# Altium PCB NeoPixel.PcbDoc
Units mil, origin at the board's own origin, x right, y up, seen from the top; angles counter-clockwise.
Board outline 3000 x 2125 mil, 2 copper layers (Top Layer, Bottom Layer); 27 components, 16 nets, 70 pads, 0 vias.
Unrouted connection lines stored in the file: 51.
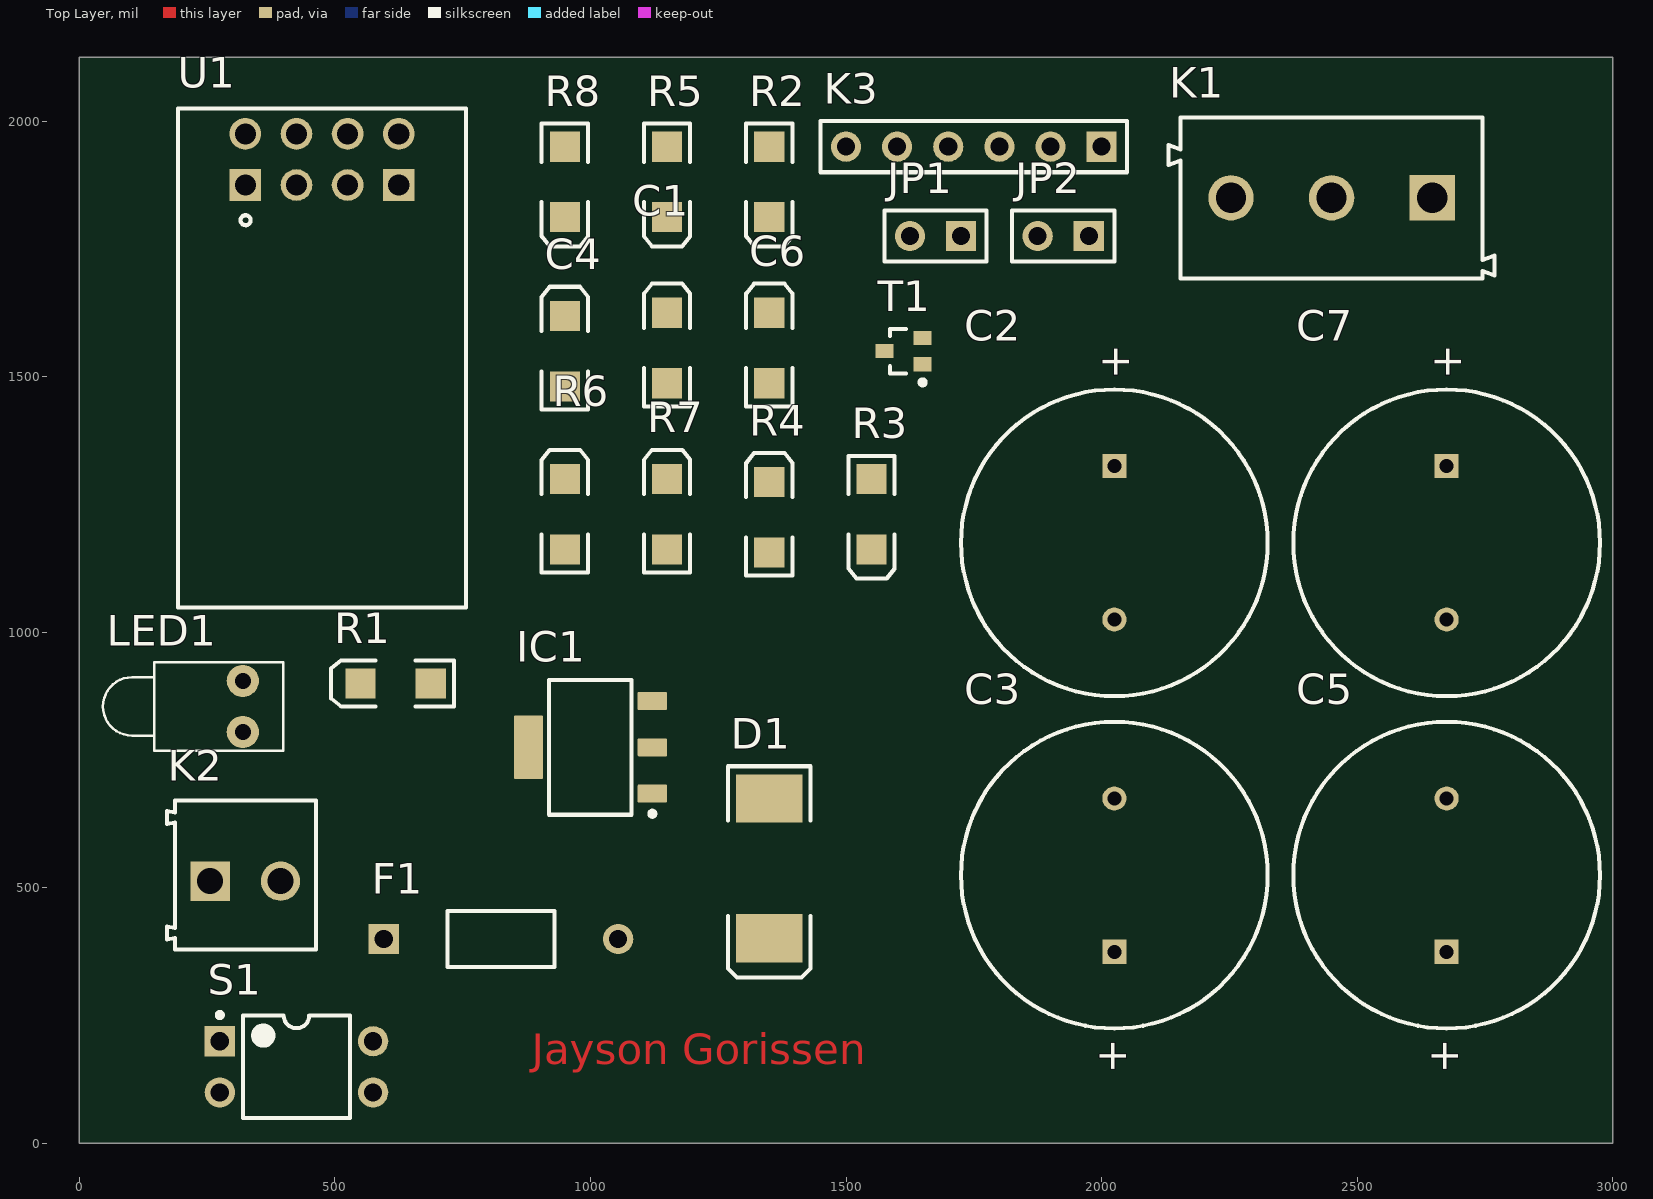
[diagram p0: Top Layer view]
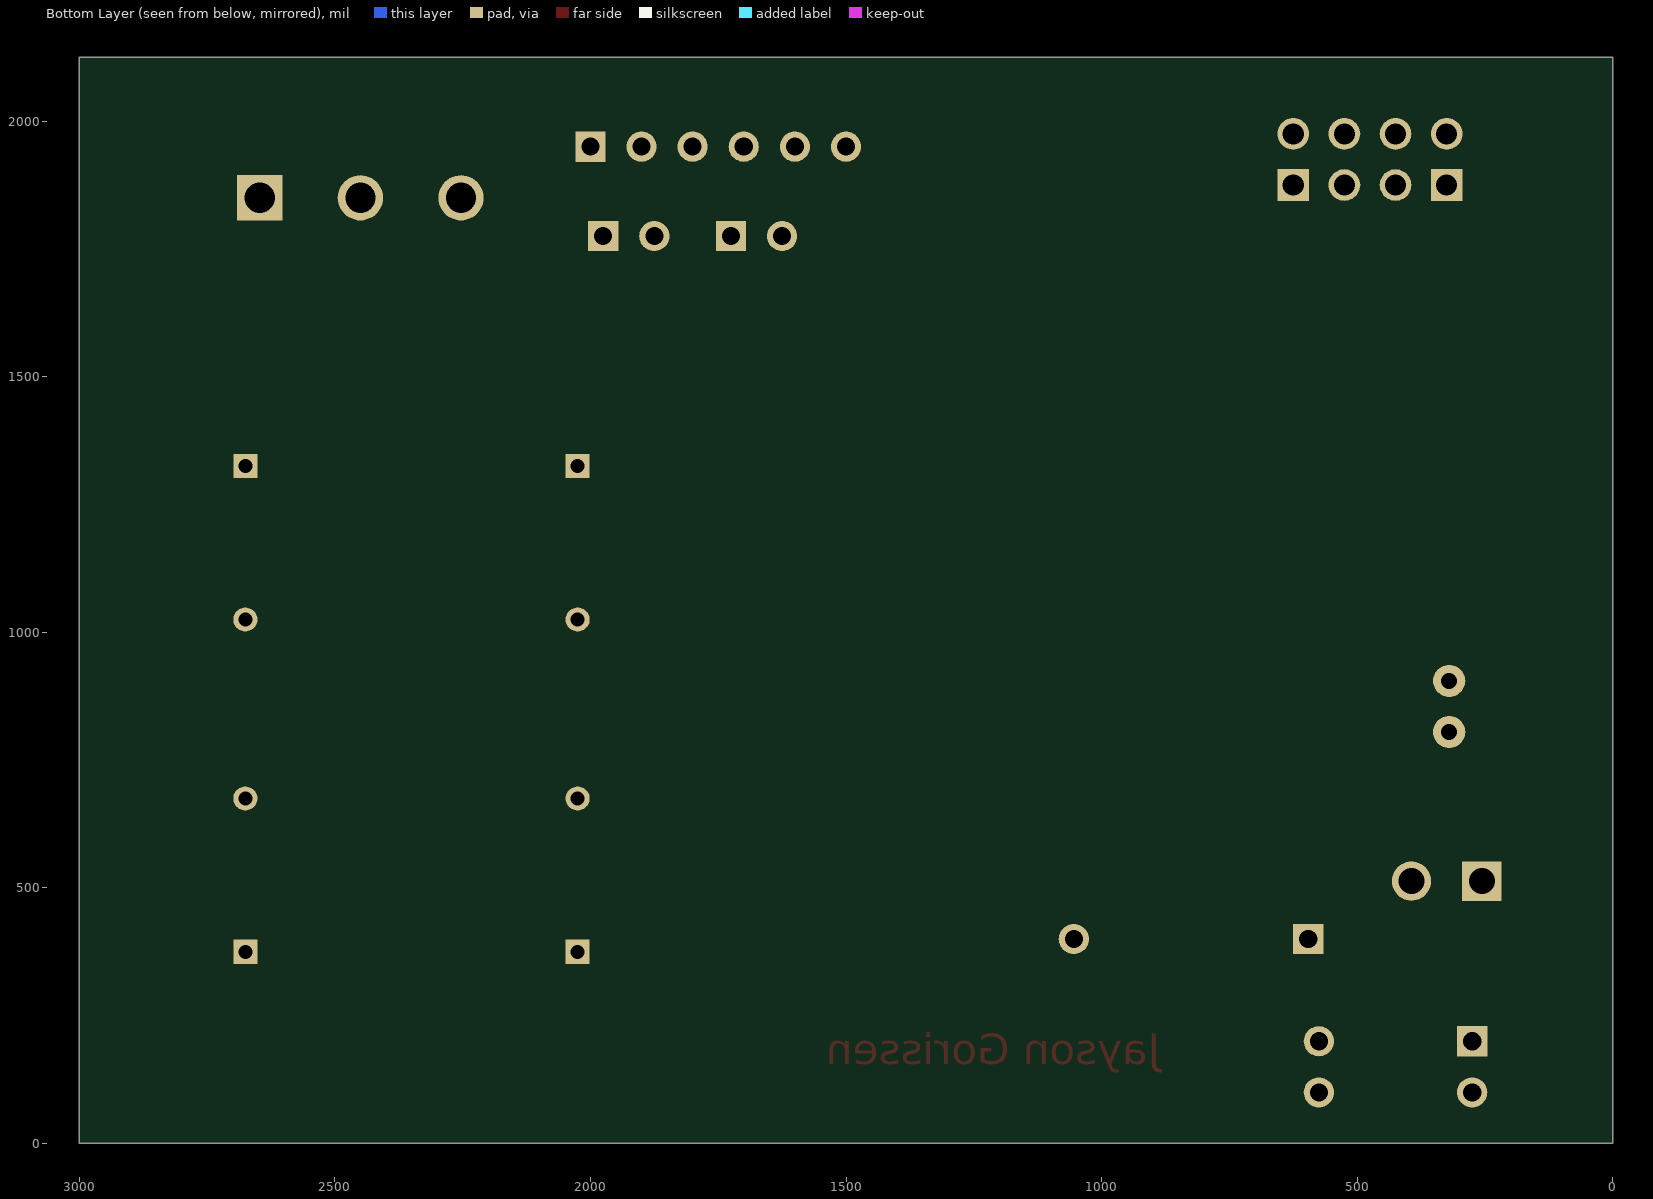
[diagram p1: Bottom Layer view, seen from below]

## Layer stack, top to bottom
Top Solder: solder mask 0.4, Solder Resist, Dk 3.5
Top Layer: signal copper 1.4
Dielectric 1: dielectric 12.6, FR-4, Dk 4.8
Bottom Layer: signal copper 1.4
Bottom Solder: solder mask 0.4, Solder Resist, Dk 3.5

## Board outline
0,0 3000,0 3000,2125 0,2125
cut-out: 5400,1175
cut-out: 3125,1850

## Design rules (kind name [scope] priority, off if disabled: settings)
Clearance [All] p1: gap=10 ignorepadtopadclearanceinfootprint=FALSE except(0: Arc-Hole Track-Hole SMDPad-Hole THPad-Hole Via-Hole Fill-Hole Poly-Hole Region-Hole Text-Hole)
PolygonConnect [All] p1: connectstyle=Relief reliefconductorwidth=10 reliefentries=4 polygonreliefangle="90 Angle" airgapwidth=10
RoutingVias [All] p1: holewidth=28 width=50 viastyle="Through Hole" minholewidth=28 minwidth=50 maxholewidth=28 maxwidth=50
SolderMaskExpansion [All] p1: expansion=4 istentingtop=FALSE
Width [All] p1: maxlimit=25 minlimit=15 preferedwidth=25 minimp=50.000000 maximp=50.000000 favimp=50.000000
30 further rules are at their usual default settings.

## Components (designator, comment, footprint, x,y, rotation, side; value= is the part's Value field where it differs from the comment)
C1 "Cap" 3.2X1.6X1.1 1150,1556.1 r90 top value=100nF
C2 "Cap Pol1" RB7.6-15 2025,1175 r90 top value=10uF
C3 "Cap Pol1" RB7.6-15 2025,525 r270 top value=100uF
C4 "Cap" 3.2X1.6X1.1 950,1550 r90 top value=100nF
C5 "Cap Pol1" RB7.6-15 2675,525 r270 top value=100uF
C6 "Cap" 3.2X1.6X1.1 1350,1556.1 r90 top value=100nF
C7 "Cap Pol1" RB7.6-15 2675,1175 r90 top value=100uF
D1 "Diode" SMC 1350,538.19 r270 top
F1 "Fuse 1" PIN-W2/E2.8 825,400 r0 top
IC1 "LM3940IMP-3.3" DCY0004A_L 1000,775 r180 top
JP1 "Header 2" HDR1X2 1725,1775 r180 top
JP2 "Header 2" HDR1X2 1975,1775 r180 top
K1 "691111710003" 691111710003 2450,1850 r180 top
K2 "691214110002" 691214110002 325,525 r0 top
K3 "Header 6" HDR1X6 2000,1950 r180 top
LED1 "LED1" LED-1 320,855 r180 top
R1 "Res1" 3.2X1.6X1.1 618.9,900 r180 top value=220
R2 "Res1" 3.2X1.6X1.1 1350,1881.1 r270 top value=10K
R3 "Res1" 3.2X1.6X1.1 1550,1231.1 r270 top value=10K
R4 "Res1" 3.2X1.6X1.1 1350,1225 r90 top value=220
R5 "Res1" 3.2X1.6X1.1 1150,1881.1 r270 top value=100K
R6 "Res1" 3.2X1.6X1.1 950,1231.1 r90 top value=10K
R7 "Res1" 3.2X1.6X1.1 1150,1231.1 r90 top value=10K
R8 "Res1" 3.2X1.6X1.1 950,1881.1 r270 top value=10K
S1 "SW DIP-2" DIP-4 425,150 r0 top
T1 "BSS138W-7-F" DIOD-SOT323-3_V 1612.4,1550 r180 top
U1 "ESP8266-01/ESP-01" *XCVR_ESP8266-01/ESP-01 475,1875 r270 top

## Footprints (in the part's own frame and the unit in brackets; to place one, negate y for a bottom-side part, rotate by r counter-clockwise, add the part's x,y. Pads: shape width x height; smd on the part's side, far side on the other; paste and mask are expansions set on the pad)
3.2X1.6X1.1 [mm] "SMT LED; 2 Flat Leads"
  rect 1.5x1.5 smd: 1(-1.75,0) 2(1.75,0)
  silkscreen extent -2.9,-1.15 3.2,1.15
691111710003 [mm] "5,00mm - modular - green - Horizontal entry with pressure clamp - 10,0mm height - 03p"
  rect 2.25x2.25 hole 1.5: 1(-5,0)
  round 2.25 hole 1.5: 2(0,0) 3(5,0)
  silkscreen extent -8.1,-4 8.1,4, body extent -8.1,-4 8.1,4, height 11.05
691214110002 [mm] "3.50 mm Horizontal Entry Modular, 2p"
  rect 1.95x1.95 hole 1.3: 1(-1.75,-0.3)
  round 1.95 hole 1.3: 2(1.75,-0.3)
  silkscreen extent -3.9,-3.7 3.5,3.7, body extent -3.95,-3.7 3.5,3.7, height 8.55
*XCVR_ESP8266-01/ESP-01 [mm]
  rect 1.575x1.575 hole 1.05: 1(0,-3.81) 4(0,3.81)
  round 1.575 hole 1.05: 2(0,-1.27) 3(0,1.27) 5(-2.54,3.81) 6(-2.54,1.27) 7(-2.54,-1.27) 8(-2.54,-3.81)
  silkscreen extent -3.81,-7.15 21,7.15
DCY0004A_L [mm] "SOT223, 4-Leads, Body 6.7x3.7mm, Pitch 2.3mm, IPC High Density"
  rrect11% 1.45x0.9 smd: 1(-3.075,2.3) 2(-3.075,0) 3(-3.075,-2.3)
  rrect7% 1.45x3.15 smd: 4(3.075,0)
  silkscreen extent -3.2,-3.35 2.05,3.42, body extent -3.5,-3.25 3.5,3.25, height 1.62
DIOD-SOT323-3_V [mm] "SOT323, 3-Leads, Body 2.2x1.35mm, Pitch 0.65mm"
  rect 0.9x0.7 smd: 1(-0.95,0.65) 2(-0.95,-0.65) 3(0.95,0)
  silkscreen extent -1.08,-1.1 0.67,1.67, body extent -1.1,-1.1 1.1,1.1, height 1.07
DIP-4 [mm] "DIP; 4 Leads; Row Spacing 7.62 mm; Pitch 2.54 mm"
  rect 1.5x1.5 hole 0.9: 1(-3.81,1.27)
  round 1.5 hole 0.9: 2(-3.81,-1.27) 3(3.81,-1.27) 4(3.81,1.27)
  silkscreen extent -3.93,-2.55 2.65,2.69, body extent -3.15,-2.5 3.15,2.5, height 5.6
HDR1X2 [mm] "Connector; Header; 2 Position"
  rect 1.5x1.5 hole 0.9: 1(0,0)
  round 1.5 hole 0.9: 2(2.54,0)
  silkscreen extent -1.27,-1.27 3.81,1.27
HDR1X6 [mm] "Connector; Header; 6 Position"
  rect 1.5x1.5 hole 0.9: 1(0,0)
  round 1.5 hole 0.9: 2(2.54,0) 3(5.08,0) 4(7.62,0) 5(10.16,0) 6(12.7,0)
  silkscreen extent -1.27,-1.27 13.97,1.27
LED-1 [mm] "LED; 2 Leads"
  round 1.6 hole 0.8: 1(0,1.27) 2(0,-1.27)
  silkscreen extent -2,-2.2 6.95,2.2
PIN-W2/E2.8 [mm] "Thru-Hole; 2 Leads"
  rect 1.5x1.5 hole 0.9: 1(-5.825,0)
  round 1.5 hole 0.9: 2(5.825,0)
  silkscreen extent -2.65,-1.4 2.65,1.4
RB7.6-15 [mm] "Polarized Capacitor (Radial); 2 Leads"
  rect 1.2x1.2 hole 0.7: 1(3.81,0)
  round 1.2 hole 0.7: 2(-3.81,0)
  silkscreen extent -7.62,-7.62 7.62,7.62
SMC [mm] "DO-214-AB/SMC; 2 C-Bend Leads; Body 7.9 x 5.9 mm, inc. leads (LxW)"
  rect 2.4x3.3 smd: 1(-3.475,0) 2(3.475,0)
  silkscreen extent -5.07,-2.05 5.43,2.06

## Part data
C1 C4 C6: "Capacitor", LatestRevisionDate=17-Jul-2002, LatestRevisionNote="Re-released for DXP Platform.", PackageDescription="Radial Cap, Thru-Hole; 2 Leads; 0.3 in Pin Spacing", PackageReference=RAD-0.3, Published=8-Jun-2000, Publisher="Altium Limited"
C2 C3 C5 C7: "Polarized Capacitor (Radial)", LatestRevisionDate=17-Jul-2002, LatestRevisionNote="Re-released for DXP Platform.", PackageDescription="Polarized Capacitor (Radial); 2 Leads", PackageReference=RB7.6-15, Published=8-Jun-2000, Publisher="Altium Limited"
D1: "Default Diode", Code_JEDEC=DO-214-AB, LatestRevisionDate=17-Jul-2002, LatestRevisionNote="Re-released for DXP Platform.", PackageDescription="DO-214-AB/SMC; 2 C-Bend Leads; Body 7.9 x 5.9 mm, inc. leads (LxW)", PackageReference=SMC, PackageVersion=Sep-1996, Published=8-Jun-2000, Publisher="Altium Limited"
F1: "Fuse", LatestRevisionDate=17-Jul-2002, LatestRevisionNote="Re-released for DXP Platform.", PackageDescription="Thru-Hole; 2 Leads", PackageReference=PIN-W2/E2.8, Published=8-Jun-2000, Publisher="Altium Limited"
IC1: library part CMP-0062-01793-3, "1A Low Dropout Regulator for 5V to 3.3V Conversion, 4-pin SOT-223", Manufacturer="Texas Instruments", PackageTopMarking=XYTT*L52B, PowerWise=N, Code_IPC=SOT223-4, Code_JEDEC=TO-261-AA, ComponentLink1Description="Datasheet URL", ComponentLink1URL=http://www.ti.com/general/docs/lit/getliterature.tsp?genericPartNumber=LM3940&fileType=pdf, CompType="LDO IC", PackageDescription="Molded SOT-223, 6.50 x 3.56 x 1.6mm Body, 4 Lead, 2.3mm Pitch", PackageReference=DCY0004A, PinCount=4, RoHS=N
JP1 JP2: "Header, 2-Pin", LatestRevisionDate=17-Jul-2002, LatestRevisionNote="Re-released for DXP Platform.", Publisher="Altium Limited"
K1: library part CMP-1502-03263-1, "Series 111 - 5.00 mm Horizontal Entry Modular with Pressure Clamp WR-TBL, 3 pin", Manufacturer="Wurth Elektronik", Operating Temperature=-40to105degC, Datasheet URL=http://katalog.we-online.de/em/datasheet/6911117100xx.pdf, Manufacturer URL=http://www.we-online.de, Mounting Technology=THT, Package Reference=691111710003, Packaging=Box, Part Number=691111710003, Pin Number=3, Pitch=5.00mm, Publisher=WurthElektronik
K2: library part CMP-1502-02464-1, "Serie 2141 - 3.50 mm Horizontal Entry Modular with Rising Cage Clamp WR-TBL, 2 pin", Manufacturer="Wurth Elektronik", Operating Temperature=-40to105degC, Datasheet URL=http://katalog.we-online.de/em/datasheet/6912141100xx.pdf, Manufacturer URL=http://www.we-online.de, Mounting Technology=THT, Package Reference=691214110002, Packaging=Box, Part Number=691214110002, Pin Number=2, Pitch=3.50mm, Publisher=WurthElektronik
K3: "Header, 6-Pin", LatestRevisionDate=17-Jul-2002, LatestRevisionNote="Re-released for DXP Platform.", Publisher="Altium Limited"
LED1: "Typical RED GaAs LED", LatestRevisionDate=08-Jul-2005, LatestRevisionNote="Mech Layer 1 removed.", PackageDescription="LED; 2 Leads", PackageReference=LED-1, Published=8-Jun-2000, Publisher="Altium Limited"
R1 R2 R3 R4 R5 R6 R7 R8: "Resistor", LatestRevisionDate=17-Jul-2002, LatestRevisionNote="Re-released for DXP Platform.", PackageDescription="Axial Device, Thru-Hole; 2 Leads; 0.3 in Pin Spacing", PackageReference=AXIAL-0.3, Published=8-Jun-2000, Publisher="Altium Limited"
S1: "DIP Switch, 2 Position, SPST", LatestRevisionDate=17-Jul-2002, LatestRevisionNote="Re-released for DXP Platform.", PackageReference=DIP-4, Published=24-Mar-1999, Publisher="Altium Limited"
T1: library part CMP-2000-05968-1, "N-Channel Enhancement Mode Mosfet, 50 V, 200 mA, -55 to 150 degC, 6-Pin SOT-323, RoHS, Tape and Reel", Id - Continuous Drain Current=200mA, Manufacturer=DiodesIncorporated, Maximum Operating Temperature=+150C, Minimum Operating Temperature=-55C, Package / Case=SOT-323-3, Package Description="3-Pin Small Outline Transistor, Body 2 x 1.25 mm, Pitch 0.65 mm", Package Reference=SOT323, Pd - Power Dissipation=200mW, Rds On - Drain-Source Resistance=1.4Ohms, Vds - Drain-Source Breakdown Voltage=75V, Vgs - Gate-Source Voltage=20V, Brand=DiodesIncorporated, Channel Mode=Enhancement, Configuration=Single, Datasheet URL=http://www.diodes.com/_files/datasheets/ds30206.pdf, Datasheet Version="Rev. 11-2, 09/2013", Factory Pack Quantity=3000, Forward Transconductance - Min=0.1S, Height=1mm, Length=2.2mm, Manufacturer URL=http://www.diodes.com/, Mounting Style=SMD/SMT, Mounting Technology=SurfaceMount, Number of Channels=1Channel, Packaging=Reel, Product=MOSFETSmallSignal, Product Category=MOSFET, RoHS=True, Series=BSS138, Technology=Si, Transistor Polarity=N-Channel, Transistor Type=1N-Channel, Type=EnhancementModeFieldEffectTransistor, Typical Turn-Off Delay Time=20ns, Typical Turn-On Delay Time=20ns, Unit Weight=0.000212oz, Width=1.35mm
U1: SnapEDA_Link=https://www.snapeda.com/parts/ESP8266-01/ESP-01/AI-Thinker/view-part/106413/?ref=snap

## Nets (pads, with @x,y where several pads share a name; then routed paths per layer and width w, separated by ;. In a path a pad name is that pad's centre, name@x,y a point inside that pad or via, vN(x,y) a via of type N, cw(c..) or ccw(c..) an arc to the next point about the centre after c; other vN are vias at no path point)
GND: C1.1 C4.1 C5.2 C6.1 C7.2 JP1.2 K1.1 K3.1 K3.2 R5.1 U1.4
NetC2_2: C2.2 C3.2 D1.1 IC1.2 IC1.4 K2.2 R1.1
NetF1_1: F1.1 S1.3
NetJP1_1: JP1.1 R8.1 U1.2
NetJP2_2: JP2.2 K3.3
NetK1_2: K1.2 R4.1 R5.2
NetK2_1: K2.1 S1.2
NetK3_4: K3.4 U1.5
NetK3_5: K3.5 U1.1
NetLED1_2: LED1.2 R1.2
NetR2_1: R2.1 R4.2 T1.3
NetR3_1: R3.1 T1.2 U1.3
NetR6_1: R6.1 U1.7
NetR7_1: R7.1 U1.6
V+: C1.2 C3.1 C5.1 D1.2 F1.2 IC1.1 JP2.1 K1.3 R2.2
VCC: C2.1 C4.2 C6.2 C7.1 IC1.3 LED1.1 R3.2 R6.2 R7.2 R8.2 T1.1 U1.8
pads on no net: K3.6 S1.1 S1.4

## Other copper
Top Layer:
  text "Jayson Gorissen" at 885,154.99 h60

## Text inside footprints (layer, text, board x,y; h text height)
C2: Top Overlay "+" at 2054.01,1495.15 h59.06 r90
C3: Top Overlay "+" at 1995.99,204.85 h59.06 r270
C5: Top Overlay "+" at 2645.99,204.85 h59.06 r270
C7: Top Overlay "+" at 2704.01,1495.15 h59.06 r90